# EAGLE board relay-set-d-latch (EAGLE 7.7.0)
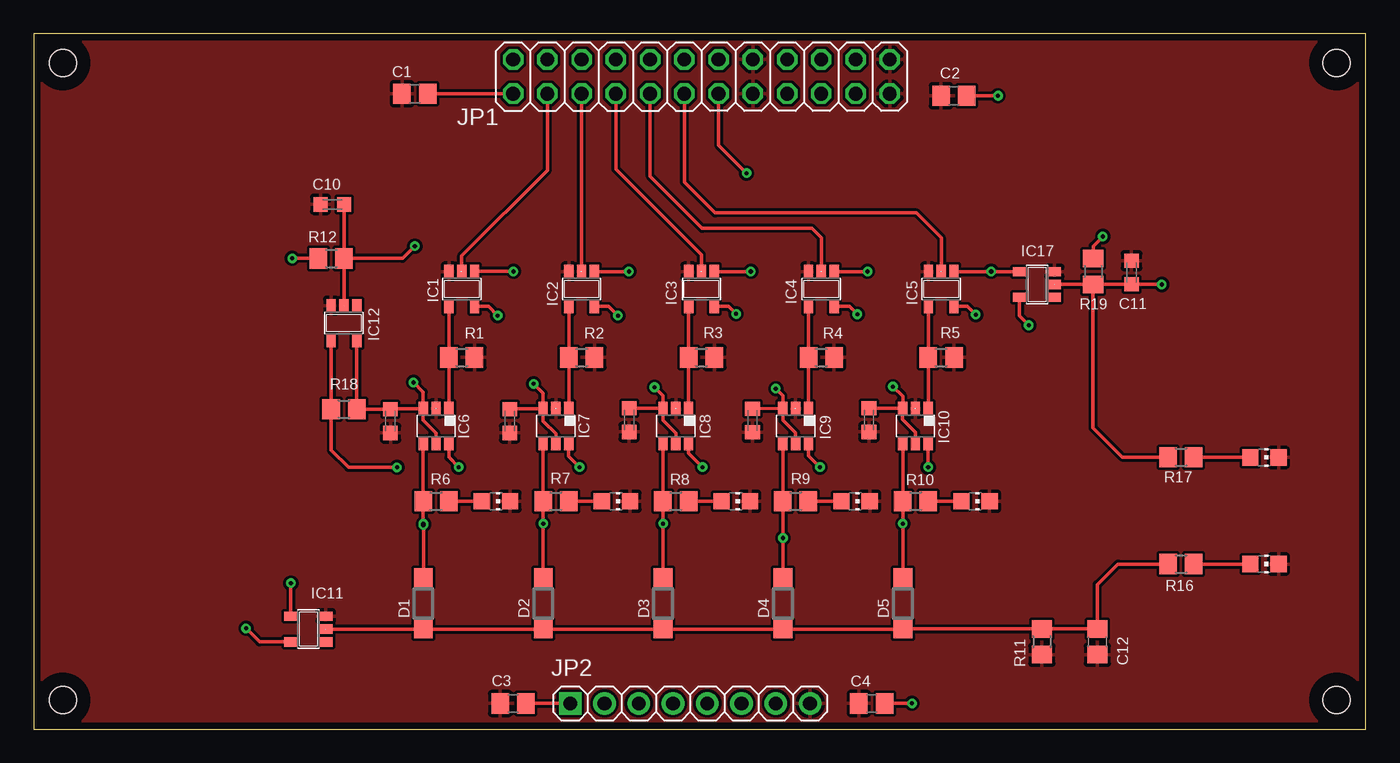
[diagram p0: board, top side]
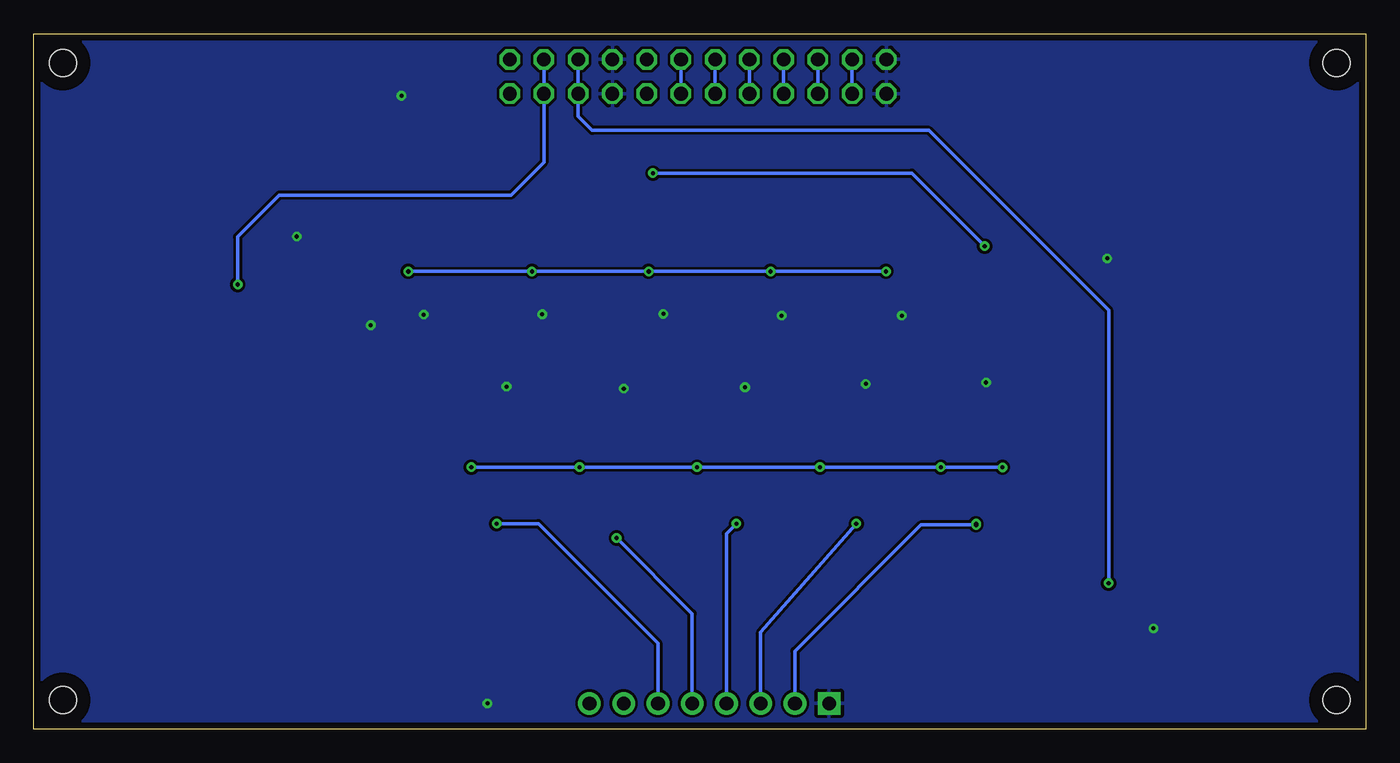
[diagram p1: board, bottom side, seen from below]

Size 98.81 x 51.56 mm. Coordinates in mm from the lower left corner, seen from the top.
Outline: 98.81,51.56 0,51.56 0,0 98.81,0 98.81,51.56
Copper layers (1*16): Top 0.035mm / dielectric 1.5mm / Bottom 0.035mm
Design rules "default *": minimum track width 8mil, minimum drill 12mil, track to track 8mil, track to pad 10mil, pad to pad 10mil, via to via 8mil, smd to smd 8mil, copper to edge 20mil, drill to drill 8mil, minimum pad ring 10mil, minimum via ring 8mil, stop-mask expansion 4mil, vias tented up to drill 0mil, thermal gap 10mil
Holes 2.01 mm at 2.16,2.16 96.65,2.16 96.65,49.4 2.16,49.4
tRestrict: area 94.6,0.2 to 98.7,4.2; area 94.6,47.4 to 98.7,51.4; area 0.2,47.4 to 4.2,51.4; area 0.2,0.2 to 4.2,4.2
bRestrict: area 94.6,0.2 to 98.7,4.2; area 94.6,47.4 to 98.7,51.4; area 0.2,47.4 to 4.2,51.4; area 0.2,0.2 to 4.2,4.2

## Footprints (pad centres in the part's own frame; a part is rotated, then mirrored left to right if it is on the bottom)
C0805 = smd 1.3 x 1.5: 1 -0.95,0; 2 0.95,0
C0603K = smd 1.05 x 1.08: 1 -0.875,0; 2 0.875,0
SOD123 = smd 1.4 x 1.4: A 1.9,0; C -1.9,0
SOT23-5 = smd 0.69 x 0.99: 1 -0.95,-1.29; 2 0,-1.29; 3 0.95,-1.29; 4 0.95,1.3; 5 -0.95,1.3
DBV_R-PDSO-G6 = smd 0.69 x 0.99: 1 -0.95,-1.29; 2 0,-1.29; 3 0.95,-1.29; 4 0.95,1.3; 5 0,1.3; 6 -0.95,1.3
2X12 = drill 1.016 octagon: 1 -13.97,-1.27; 2 -13.97,1.27; 3 -11.43,-1.27; 4 -11.43,1.27; 5 -8.89,-1.27; 6 -8.89,1.27; 7 -6.35,-1.27; 8 -6.35,1.27; 9 -3.81,-1.27; 10 -3.81,1.27; 11 -1.27,-1.27; 12 -1.27,1.27; 13 1.27,-1.27; 14 1.27,1.27; 15 3.81,-1.27; 16 3.81,1.27; 17 6.35,-1.27; 18 6.35,1.27; 19 8.89,-1.27; 20 8.89,1.27; 21 11.43,-1.27; 22 11.43,1.27; 23 13.97,-1.27; 24 13.97,1.27
1X08 = drill 1.016 pad 1.676 square: 1 -8.89,0 | drill 1.016 pad 1.676: 2 -6.35,0; 3 -3.81,0; 4 -1.27,0; 5 1.27,0; 6 3.81,0; 7 6.35,0; 8 8.89,0
CHIP-LED0805 = smd 1.2 x 1.2: A 0,-1.05; C 0,1.05
R0805 = smd 1.3 x 1.5: 1 -0.95,0; 2 0.95,0

## Placement (x,y rotation side)
C1  [C0805]  28.27,47.12 180 top
C2  [C0805]  68.25,46.96 180 top
C3  [C0805]  35.56,1.91 180 top
C4  [C0805]  62.15,1.91 180 top
C5  [C0603K]  35.31,22.83 270 top
C6  [C0603K]  44.17,22.91 270 top
C7  [C0603K]  53.31,22.89 270 top
C8  [C0603K]  61.95,22.91 270 top
C9  [C0603K]  26.47,22.83 270 top
C10  1uF  [C0603K]  22.15,38.91 180 top
C11  1uF  [C0603K]  81.43,33.86 90 top
C12  [C0805]  78.89,6.48 270 top
D1  MBR0520LT  [SOD123]  28.91,9.32 90 top
D2  MBR0520LT  [SOD123]  37.8,9.32 90 top
D3  MBR0520LT  [SOD123]  46.69,9.32 90 top
D4  MBR0520LT  [SOD123]  55.58,9.32 90 top
D5  MBR0520LT  [SOD123]  64.47,9.32 90 top
IC1  74LVC1G125DBV  [SOT23-5]  31.75,32.64 180 top
IC2  74LVC1G125DBV  [SOT23-5]  40.64,32.64 180 top
IC3  74LVC1G125DBV  [SOT23-5]  49.53,32.64 180 top
IC4  74LVC1G125DBV  [SOT23-5]  58.42,32.64 180 top
IC5  74LVC1G125DBV  [SOT23-5]  67.31,32.64 180 top
IC6  741G175  [DBV_R-PDSO-G6]  29.84,22.48 180 top
IC7  741G175  [DBV_R-PDSO-G6]  38.73,22.48 180 top
IC8  741G175  [DBV_R-PDSO-G6]  47.62,22.48 180 top
IC9  741G175  [DBV_R-PDSO-G6]  56.52,22.48 180 top
IC10  741G175  [DBV_R-PDSO-G6]  65.41,22.48 180 top
IC11  74LVC1G17DBV  [SOT23-5]  20.37,7.42 90 top
IC12  74LVC1G17DBV  [SOT23-5]  23.01,30.1 180 top
IC17  74LVC1G14DBV  [SOT23-5]  74.42,32.97 90 top
JP1  [2X12]  49.53,48.39 0 top
JP2  [1X08]  48.69,1.91 0 top
LED1  [CHIP-LED0805]  34.29,16.89 270 top
LED2  [CHIP-LED0805]  43.18,16.89 270 top
LED3  [CHIP-LED0805]  52.07,16.89 270 top
LED4  [CHIP-LED0805]  60.96,16.89 270 top
LED5  [CHIP-LED0805]  69.85,16.89 270 top
LED6  [CHIP-LED0805]  91.29,12.24 270 top
LED7  [CHIP-LED0805]  91.29,20.14 270 top
R1  [R0805]  31.75,27.56 0 top
R2  [R0805]  40.64,27.56 0 top
R3  [R0805]  49.53,27.56 0 top
R4  [R0805]  58.42,27.56 0 top
R5  [R0805]  67.31,27.56 0 top
R6  [R0805]  29.84,16.89 0 top
R7  [R0805]  38.73,16.89 0 top
R8  [R0805]  47.62,16.89 0 top
R9  [R0805]  56.52,16.89 0 top
R10  [R0805]  65.41,16.89 0 top
R11  [R0805]  74.78,6.48 270 top
R12  [R0805]  22.07,34.9 0 top
R16  [R0805]  85.09,12.24 0 top
R17  [R0805]  85.09,20.17 0 top
R18  [R0805]  23.01,23.72 0 top
R19  [R0805]  78.59,33.93 270 top

## Library data of the parts
C1-C12 R1-R12 R16-R19 = resistor
D1-D5 = diode
IC1-IC12 IC17 = 74xx-little-us
JP1 = custom-pinhead
JP2 = pinhead
LED1-LED7 = led

## Nets
!CLEAR: IC6.6 IC7.6 IC8.6 IC9.6 IC10.6 IC12.4 R18.1
!ENABLE: IC1.1 IC2.1 IC3.1 IC4.1 IC5.1 IC17.4
!RESET: C10.1 IC12.2 JP1.13 JP1.14 R12.2
DA: IC1.4 IC6.1 R1.1
DA_IN: IC1.2 JP1.3 JP1.4
DA_OUT: D1.A IC6.4 JP2.2 R6.1
DATA: C12.1 D1.C D2.C D3.C D4.C D5.C IC11.2 R11.1 R16.1
DB: IC2.4 IC7.1 R2.1
DB_IN: IC2.2 JP1.5 JP1.6
DB_OUT: D2.A IC7.4 JP2.3 R7.1
DC: IC3.4 IC8.1 R3.1
DC_IN: IC3.2 JP1.7 JP1.8
DC_OUT: D3.A IC8.4 JP2.4 R8.1
DD: IC4.4 IC9.1 R4.1
DD_IN: IC4.2 JP1.9 JP1.10
DD_OUT: D4.A IC9.4 JP2.5 R9.1
DE: IC5.4 IC10.1 R5.1
DE_IN: IC5.2 JP1.11 JP1.12
DE_OUT: D5.A IC10.4 JP2.6 R10.1
GND: C1.2 C2.2 C3.2 C4.2 C5.2 C6.2 C7.2 C8.2 C9.2 C10.2 C11.2 C12.2 IC1.3 IC2.3 IC3.3 IC4.3 IC5.3 IC6.2 IC7.2 IC8.2 IC9.2 IC10.2 IC11.3 IC12.3 IC17.3 JP1.15 JP1.16 JP1.23 JP1.24 JP2.8 LED1.C LED2.C LED3.C LED4.C LED5.C LED6.C LED7.C R1.2 R2.2 R3.2 R4.2 R5.2 R11.2
N$20: LED1.A R6.2
N$21: LED2.A R7.2
N$22: LED3.A R8.2
N$24: LED7.A R17.2
N$27: LED6.A R16.2
N$28: LED4.A R9.2
N$29: LED5.A R10.2
SELECT: C11.1 IC17.2 JP1.21 JP1.22 R17.1 R19.2
VALDATA: IC11.4 JP1.19 JP1.20
VCC: C1.1 C2.1 C3.1 C4.1 C5.1 C6.1 C7.1 C8.1 C9.1 IC1.5 IC2.5 IC3.5 IC4.5 IC5.5 IC6.3 IC6.5 IC7.3 IC7.5 IC8.3 IC8.5 IC9.3 IC9.5 IC10.3 IC10.5 IC11.5 IC12.5 IC17.5 JP1.1 JP1.2 JP1.17 JP1.18 JP2.1 R12.1 R18.2 R19.1

## Tracks (layer width: path | path; a pad name or v marks a point on that pad's centre or on a via)
!CLEAR  (via drill 0.3)
  Top 0.254: IC6.6 30.8,20.16 v31.52,19.43 | v66.34,19.43 66.34,21.17 IC10.6 | IC7.6 39.69,20.23 v40.49,19.43 | IC8.6 48.58,20.46 v49.61,19.43 | IC9.6 57.47,20.28 v58.32,19.43 | IC12.4 R18.1 22.06,20.69 23.34,19.41 v26.95,19.41
  Bottom 0.254: v66.34,19.43 v58.32,19.43 v49.61,19.43 v40.49,19.43 v31.52,19.43 31.5,19.41 v26.95,19.41
!ENABLE  (via drill 0.3 pad 0.41)
  Top 0.254: IC2.1 v44.14,33.93 v44.15,33.93 | v35.59,33.93 IC1.1 | IC3.1 v53.18,33.93 v53.19,33.93 | IC4.1 v61.84,33.93 v61.85,33.93 | IC5.1 v71.01,33.93 | v71.01,33.93 v71.02,33.93 | 73.11,33.93 IC17.4 v71.01,33.93
  Bottom 0.254: v35.59,33.93 v44.15,33.93 v53.19,33.93 v61.85,33.93 v71.02,33.93
!RESET  (via drill 0.3)
  Top 0.254: JP1.13 50.8,43.31 v52.88,41.22 | v28.27,35.81 27.36,34.9 R12.2 | R12.2 C10.1 | R12.2 IC12.2
  Bottom 0.254: JP1.13 JP1.14 | v52.88,41.22 33.68,41.22 v28.27,35.81
DA
  Top 0.254: 30.8,27.58 R1.1 | 30.77,23.79 IC6.1 R1.1 | IC1.4 R1.1
DA_IN
  Top 0.254: IC1.2 31.75,35.1 38.1,41.45 JP1.3
  Bottom 0.254: JP1.3 JP1.4
DA_OUT  (via drill 0.3)
  Top 0.254: IC6.4 R6.1 28.89,15.25 v28.91,15.24 v28.91,15.14 D1.A
  Bottom 0.254: v28.91,15.14 32.99,15.14 42.34,5.79 JP2.2
DATA
  Top 0.254: IC11.2 D1.C D2.C D3.C D4.C D5.C R11.1 C12.1 78.89,10.72 80.42,12.24 R16.1
DB
  Top 0.254: IC2.4 R2.1 IC7.1
DB_IN
  Top 0.254: IC2.2 JP1.5
  Bottom 0.254: JP1.5 JP1.6
DB_OUT  (via drill 0.3)
  Top 0.254: IC7.4 R7.1 | 37.8,16.88 R7.1 | R7.1 37.78,15.25 v37.8,15.24 D2.A
  Bottom 0.254: JP2.3 44.88,7.19 v37.8,15.24
DC
  Top 0.254: IC3.4 R3.1 IC8.1
DC_IN
  Top 0.254: 49.48,33.98 IC3.2 49.53,35.18 43.18,41.53 JP1.7
  Bottom 0.254: JP1.7 JP1.8
DC_OUT  (via drill 0.3)
  Top 0.254: IC8.4 R8.1 46.67,15.25 v46.69,15.24 D3.A
  Bottom 0.254: JP2.4 47.42,14.5 v46.69,15.24
DD
  Top 0.254: IC4.4 R4.1 IC9.1
DD_IN
  Top 0.254: IC4.2 58.42,36.45 57.73,37.13 49.58,37.13 45.72,41 JP1.9
  Bottom 0.254: JP1.9 JP1.10
DD_OUT  (via drill 0.3)
  Top 0.254: IC9.4 R9.1 55.56,14.18 v55.58,14.17 D4.A
  Bottom 0.254: JP2.5 49.96,8.56 v55.58,14.17
DE
  Top 0.254: IC5.4 R5.1 IC10.1
DE_IN
  Top 0.254: JP1.11 48.26,40.56 50.55,38.28 65.48,38.28 67.31,36.45 IC5.2
  Bottom 0.254: JP1.11 JP1.12
DE_OUT  (via drill 0.3)
  Top 0.254: IC10.4 R10.1 64.45,15.25 v64.47,15.24 D5.A
  Bottom 0.254: v64.47,15.24 61.37,15.24 52.5,6.38 JP2.6
GND
  pour Top (rank 2): 98.55,0.25 0.25,0.25 0.25,51.31 98.55,51.31
N$20
  Top 0.254: R6.2 LED1.A
N$21
  Top 0.254: R7.2 LED2.A
N$22
  Top 0.254: R8.2 LED3.A
N$24
  Top 0.254: R17.2 90.21,20.17 LED7.A
N$27
  Top 0.254: R16.2 LED6.A
N$28
  Top 0.254: R9.2 LED4.A
N$29
  Top 0.254: R10.2 LED5.A
SELECT  (via drill 0.3)
  Top 0.254: IC17.2 78.57,32.97 | v83.67,32.97 83.65,32.98 C11.1 R19.2 78.57,32.97 | 78.57,32.97 78.57,22.34 80.75,20.17 R17.1
  Bottom 0.254: v83.67,32.97 83.69,32.99 83.69,36.5 80.59,39.6 63.4,39.6 60.96,42.04 JP1.21 JP1.22
VALDATA  (via drill 0.3)
  Top 0.254: v19.07,10.82 IC11.4
  Bottom 0.254: v19.07,10.82 19.07,31.06 32.41,44.4 57.38,44.4 58.42,45.44 JP1.19 JP1.20
VCC  (via drill 0.3, 0.3 pad 0.41)
  Top 0.254: IC1.5 33.74,31.34 v34.42,30.66 | IC2.5 42.65,31.34 v43.33,30.66 | IC3.5 51.54,31.34 v52.09,30.79 | IC4.5 60.51,31.34 v61.09,30.76 | IC5.5 69.27,31.34 v69.88,30.73 | IC6.3 28.89,24.98 v28.17,25.7 | IC6.5 29.84,21.92 28.88,22.89 28.88,23.75 IC6.3 | IC7.5 38.73,21.89 37.8,22.84 37.8,23.76 IC7.3 | IC8.5 47.62,21.92 46.66,22.89 46.66,23.75 IC8.3 | IC9.5 56.52,21.97 55.58,22.91 55.58,23.76 IC9.3 | IC10.5 65.41,22.02 64.44,22.99 64.44,23.75 IC10.3 | IC7.3 37.78,24.9 v37.08,25.6 | IC8.3 46.67,24.72 v46.05,25.35 | IC9.3 55.56,24.72 v55.04,25.25 | IC10.3 64.45,24.67 v63.73,25.4 | IC6.3 26.48,23.77 C9.1 | IC7.3 35.32,23.77 C5.1 | C6.1 46.66,23.79 IC8.3 | C7.1 55.55,23.79 IC9.3 | C8.1 64.44,23.79 IC10.3 | C4.1 v65.15,1.91 | JP1.1 C1.1 | C2.1 v71.53,46.97 | C3.1 JP2.1 | IC17.5 73.12,30.64 v73.81,29.95 | R19.1 78.59,35.81 v79.3,36.52 | IC11.5 16.75,6.47 v15.75,7.47 | C9.1 | R12.1 v19.18,34.9 | IC12.5 R18.2 C9.1
  pour Bottom: 98.55,0.25 0.25,0.25 0.25,51.31 98.55,51.31

## Text on the board
Document: Relay Set D / Latch | SEL | VAL | A | B | C | D | E